# EAGLE board combined (EAGLE 6.5.0), part 1 of 2
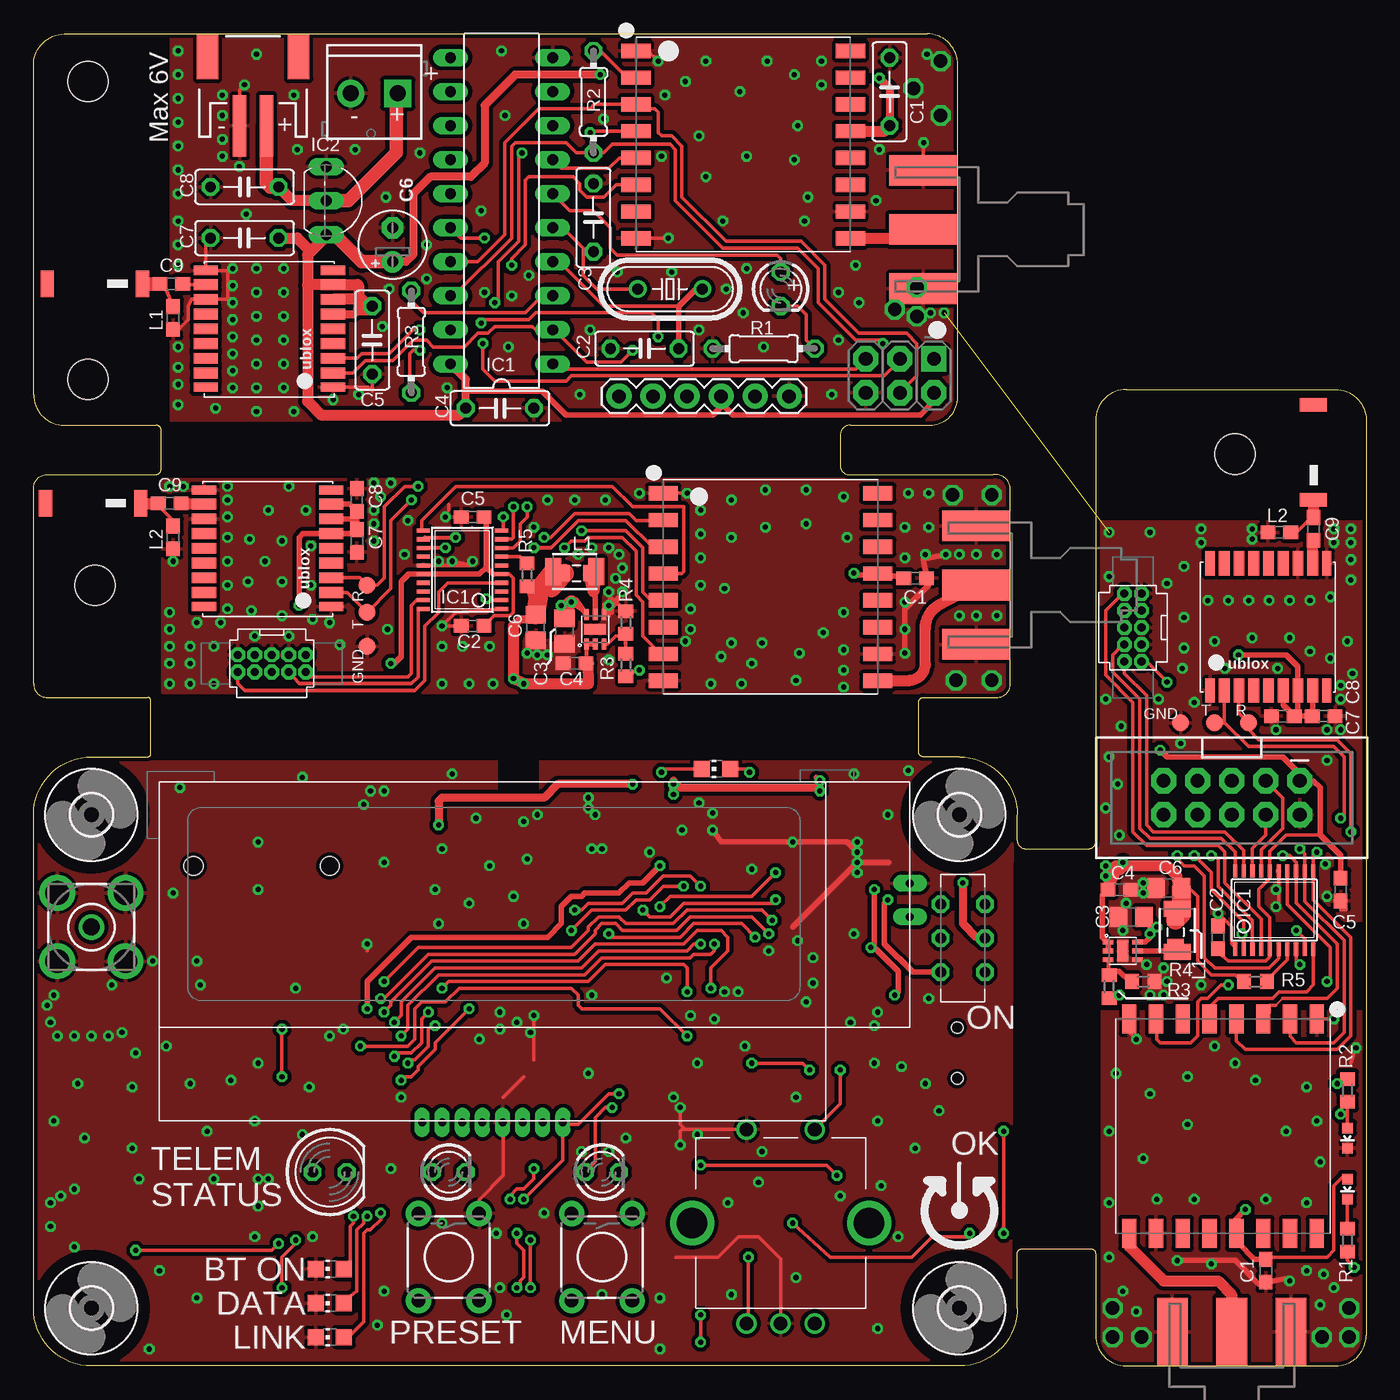
[diagram p0: board, top side]
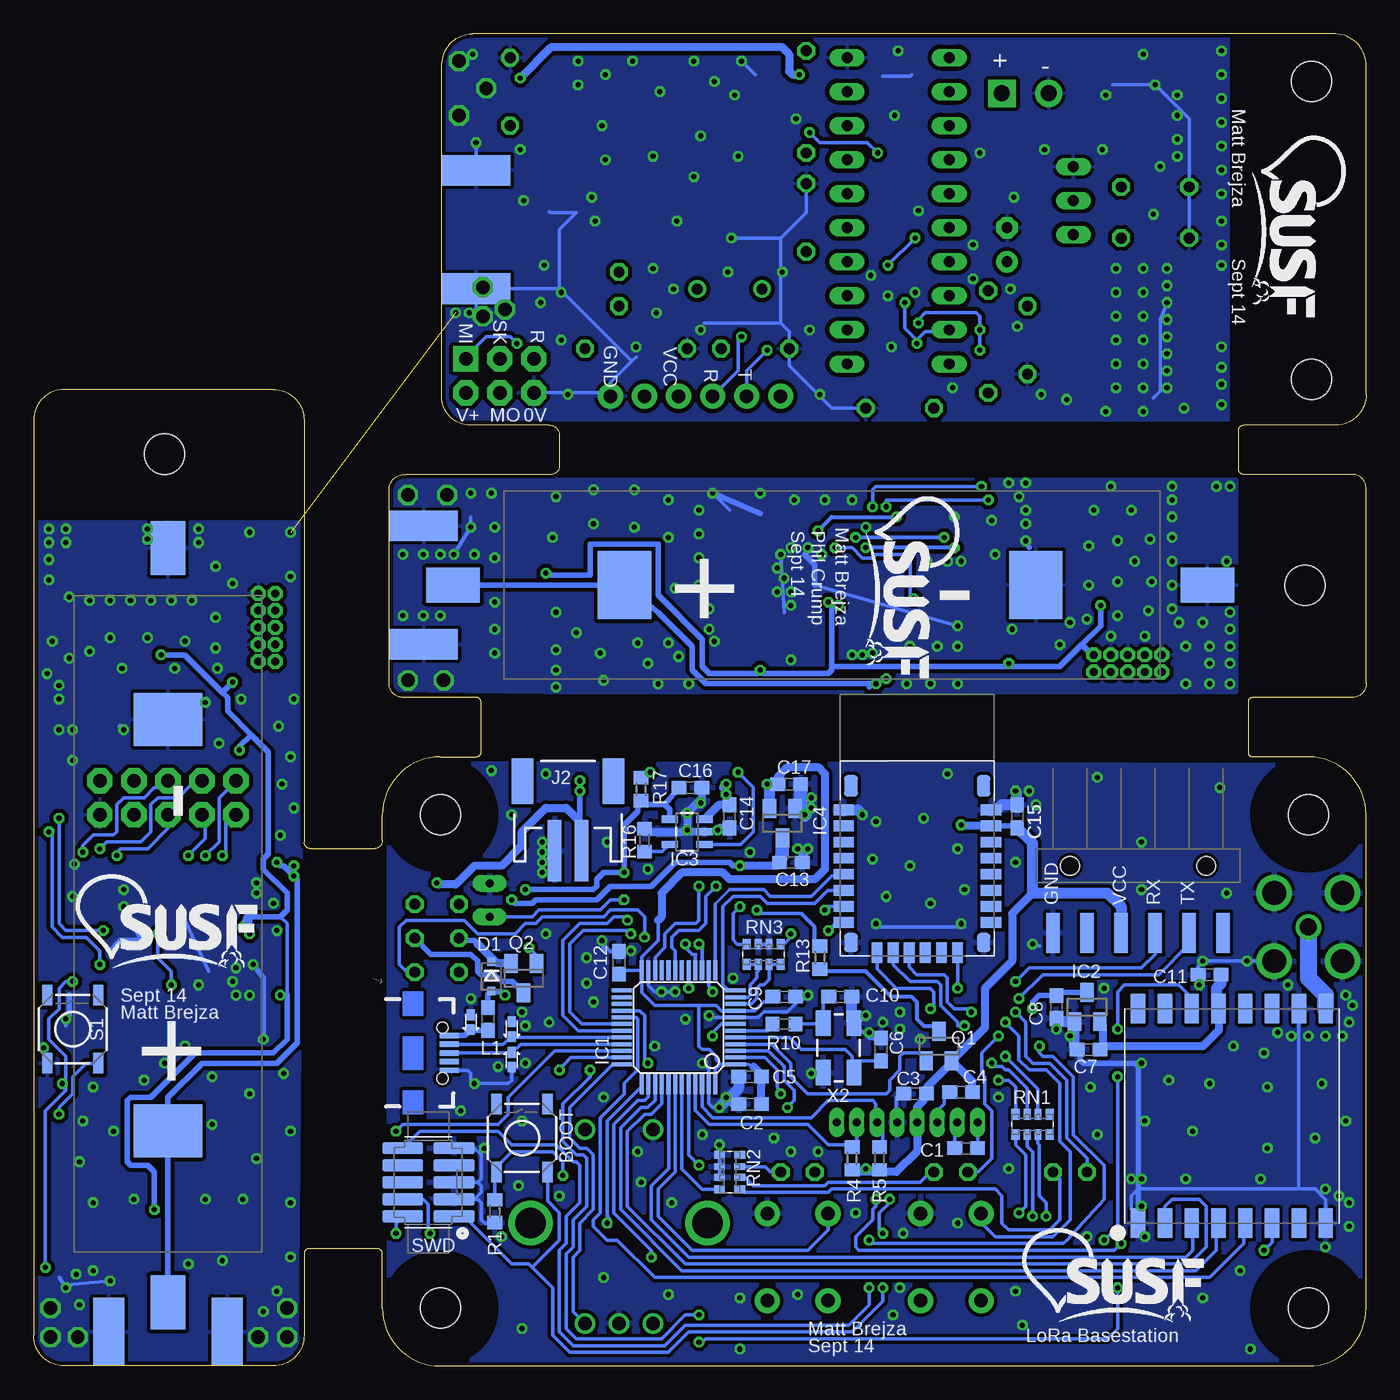
[diagram p1: board, bottom side, seen from below]

Size 99.44 x 99.44 mm. Coordinates in mm from the lower left corner, seen from the top.
Outline: 4.32,45.47 8.51,45.47 arc90 8.76,45.72 8.76,49.66 arc90 8.51,49.91 1.02,49.91 arc-90 0,50.93 0,65.53 arc-90 1.02,66.55 9.14,66.55 arc90 9.52,66.93 9.52,69.85 arc90 9.14,70.23 2.29,70.23 arc-90 0,72.52 0,97.03 arc-90 2.29,99.44 66.68,99.44 arc-90 68.96,97.16 68.96,72.14 arc-90 66.68,70.23 60.96,70.23 arc90 60.2,69.47 60.2,67.18 arc90 60.83,66.55 71.63,66.55 arc-90 72.9,65.53 72.9,50.93 arc-90 71.88,49.91 66.42,49.91 arc90 66.04,49.53 66.04,45.85 arc90 66.42,45.47 69.09,45.47 arc-90 73.41,41.15 73.41,39.24 arc90 74.04,38.61 78.74,38.61 arc90 79.25,39.12 79.25,70.61 arc-90 81.53,72.9 97.16,72.9 arc-90 99.44,70.61 99.44,2.29 arc-90 97.16,0 81.53,0 arc-90 79.25,2.29 79.25,8.38 arc90 78.87,8.76 73.79,8.76 arc90 73.41,8.38 73.41,4.32 arc-90 69.09,0 4.32,0 arc-90 0,4.32 0,41.15 arc-90 4.32,45.47
Copper layers (1*16): Top 0.035mm / dielectric 1.5mm / Bottom 0.035mm
Design rules "default *": minimum track width 7mil, minimum drill 15mil, track to track 7mil, track to pad 7mil, pad to pad 6mil, via to via 7mil, smd to smd 0mil, copper to edge 10mil, drill to drill 8mil, minimum pad ring 10mil, minimum via ring 8mil, stop-mask expansion 4mil, vias tented up to drill 16mil, thermal gap 10mil
Holes 3 mm at 89.66,68.07 4.57,58.29 4.06,95.89 4.06,73.66
tKeepout: area 35.1,43.2 to 37.3,45

## Footprints (pad centres in the part's own frame; a part is rotated, then mirrored left to right if it is on the bottom)
C0603 = smd 1.1 x 1: 1 -0.85,0; 2 0.85,0
C0805 = smd 1.3 x 1.5: 1 -0.95,0; 2 0.95,0
C050-025X075 = drill 0.813 octagon: 1 -2.54,0; 2 2.54,0
E2,5-5 = drill 0.813 pad 1.6: + -1.27,0 | drill 0.813 pad 1.6 octagon: - 1.27,0
SOD323-R = smd 0.6 x 0.6: A 1.1,0; C -1.1,0
SOD-523 = smd 0.8 x 0.6: A -0.55,0; C 0.55,0
3,0 = hole 3: 0,0
TQFP48 = smd 0.3 x 1.5: 1 -2.75,-4.25; 2 -2.25,-4.25; 3 -1.75,-4.25; 4 -1.25,-4.25; 5 -0.75,-4.25; 6 -0.25,-4.25; 7 0.25,-4.25; 8 0.75,-4.25; 9 1.25,-4.25; 10 1.75,-4.25; 11 2.25,-4.25; 12 2.75,-4.25; 25 2.75,4.25; 26 2.25,4.25; 27 1.75,4.25; 28 1.25,4.25; 29 0.75,4.25; 30 0.25,4.25; 31 -0.25,4.25; 32 -0.75,4.25; 33 -1.25,4.25; 34 -1.75,4.25; 35 -2.25,4.25; 36 -2.75,4.25 | smd 1.5 x 0.3: 13 4.25,-2.75; 14 4.25,-2.25; 15 4.25,-1.75; 16 4.25,-1.25; 17 4.25,-0.75; 18 4.25,-0.25; 19 4.25,0.25; 20 4.25,0.75; 21 4.25,1.25; 22 4.25,1.75; 23 4.25,2.25; 24 4.25,2.75; 37 -4.25,2.75; 38 -4.25,2.25; 39 -4.25,1.75; 40 -4.25,1.25; 41 -4.25,0.75; 42 -4.25,0.25; 43 -4.25,-0.25; 44 -4.25,-0.75; 45 -4.25,-1.25; 46 -4.25,-1.75; 47 -4.25,-2.25; 48 -4.25,-2.75
SOT23 = smd 1 x 1.4: 1 -0.95,-1.1; 2 0.95,-1.1; 3 0,1.1
SOT23-5 = smd 0.55 x 1.2: 1 -0.95,-1.3; 2 0,-1.3; 3 0.95,-1.3; 4 0.95,1.3; 5 -0.95,1.3
TSSOP20 = smd 0.305 x 0.991: 1 -2.925,-2.918; 2 -2.275,-2.918; 3 -1.625,-2.918; 4 -0.975,-2.918; 5 -0.325,-2.918; 6 0.325,-2.918; 7 0.975,-2.918; 8 1.625,-2.918; 9 2.275,-2.918; 10 2.925,-2.918; 11 2.925,2.918; 12 2.275,2.918; 13 1.625,2.918; 14 0.975,2.918; 15 0.325,2.918; 16 -0.325,2.918; 17 -0.975,2.918; 18 -1.625,2.918; 19 -2.275,2.918; 20 -2.925,2.918
LFCSP6 = smd 0.35 x 0.8: 1 -0.65,-1.1; 2 0,-1.1; 3 0.65,-1.1; 4 0.65,1.1; 5 0,1.1; 6 -0.65,1.1 | smd 1.6 x 0.8: EP 0,0
DIL20 = drill 0.813 long: 1 -11.43,-3.81; 2 -8.89,-3.81; 3 -6.35,-3.81; 4 -3.81,-3.81; 5 -1.27,-3.81; 6 1.27,-3.81; 7 3.81,-3.81; 8 6.35,-3.81; 9 8.89,-3.81; 10 11.43,-3.81; 11 11.43,3.81; 12 8.89,3.81; 13 6.35,3.81; 14 3.81,3.81; 15 1.27,3.81; 16 -1.27,3.81; 17 -3.81,3.81; 18 -6.35,3.81; 19 -8.89,3.81; 20 -11.43,3.81
TO92-INLINE = drill 0.813 long: GND -2.54,0; VIN 0,0; VOUT 2.54,0
SWD_SMD_SHROUD = smd 0.914 x 3.048: 1 -2.54,-1.905; 2 -2.54,1.905; 3 -1.27,-1.905; 4 -1.27,1.905; 5 0,-1.905; 6 0,1.905; 7 1.27,-1.905; 8 1.27,1.905; 9 2.54,-1.905; 10 2.54,1.905
JST-2-SMD = smd 1 x 4.6: 1 -1,-3.7; 2 1,-3.7 | smd 1.6 x 3.4: NC1 -3.4,1.5; NC2 3.4,1.5
SWD_PTH_SHROUD = drill 0.6 octagon: 1 -2.54,-0.635; 2 -2.54,0.635; 3 -1.27,-0.635; 4 -1.27,0.635; 5 0,-0.635; 6 0,0.635; 7 1.27,-0.635; 8 1.27,0.635; 9 2.54,-0.635; 10 2.54,0.635
2X3-NS = drill 1.016 pad 1.88 square: 1 -2.54,-1.27 | drill 1.016 pad 1.88 octagon: 2 -2.54,1.27; 3 0,-1.27; 4 0,1.27; 5 2.54,-1.27; 6 2.54,1.27
USB-B-MICRO-SMD_V03 = smd 1.4 x 0.4: D+1 2.7,0; D-1 2.7,0.65; GND1 2.7,-1.3; ID1 2.7,-0.65; VBUS1 2.7,1.3 | hole 0.85: 2.2,1.9; 2.2,-1.9
1X06-SMD = smd 1 x 3: 1 -6.35,5; 2 -3.81,5; 3 -1.27,5; 4 1.27,5; 5 3.81,5; 6 6.35,5 | hole 1.4: -5.08,0; 5.08,0
2X5-SHROUDED = drill 1.016 pad 1.88 octagon: 1 -1.27,5.08; 2 1.27,5.08; 3 -1.27,2.54; 4 1.27,2.54; 5 -1.27,0; 6 1.27,0; 7 -1.27,-2.54; 8 1.27,-2.54; 9 -1.27,-5.08; 10 1.27,-5.08
SCREWTERMINAL-3.5MM-2 = drill 1.2 pad 2.032 square: 1 0,0 | drill 1.2 pad 2.032: 2 3.5,0
FTDI_BASIC = drill 1.016 pad 1.88: CTS 10.16,0; DTR 0,0; GND 12.7,0; RXI 2.54,0; TXO 5.08,0; VCC 7.62,0
0603 = smd 1.1 x 1: 1 -0.85,0; 2 0.85,0
0805 = smd 0.8 x 1.2: 1 -0.9,0; 2 0.9,0
1210 = smd 1.2 x 2: 1 -1.6,0; 2 1.6,0
CHIP-LED0805 = smd 1.2 x 1.2: A 0,-1.05; C 0,1.05
LED5MM = drill 0.813 octagon: A -1.27,0; K 1.27,0
LED3MM = drill 0.813 octagon: A -1.27,0; K 1.27,0
LED-0603 = smd 0.8 x 0.8: A 0,-0.75; C 0,0.75
HC49/S = drill 0.813: 1 -2.413,0; 2 2.413,0
R0603 = smd 1 x 1.1: 1 -0.85,0; 2 0.85,0
0204/7 = drill 0.813 octagon: 1 -3.81,0; 2 3.81,0
EXB38V = smd 0.6 x 0.8: 1 -1.275,-0.75; 4 1.275,-0.75; 5 1.275,0.75; 8 -1.275,0.75 | smd 0.5 x 0.8: 2 -0.4,-0.75; 3 0.4,-0.75; 6 0.4,0.75; 7 -0.4,0.75
TACTILE-PTH = drill 1.016 pad 1.88: 1 -3.251,2.261; 2 3.251,2.261; 3 -3.251,-2.261; 4 3.251,-2.261
TACTILE_SWITCH_SMD = smd 1.524 x 0.762: 1 -2.54,1.905; 2 2.54,1.905; 3 -2.54,-1.905; 4 2.54,-1.905
ROTARY_ENC_PLAIN = drill 1.016: A 7.493,-2.54; B 7.493,2.54; C 7.493,0; SW+ -6.985,2.54; SW- -6.985,-2.54 | drill 2.286: P$3 0,6.604; P$4 0,-6.604
B1,27 = smd 1.27 x 1.27: TP 0,0
NHD-C0216CIZ-FSW = drill 0.6 long: 1 30.1,-0.1; 2 28.6,-0.1; 3 27.1,-0.1; 4 25.6,-0.1; 5 24.1,-0.1; 6 22.6,-0.1; 7 21.1,-0.1; 8 19.6,-0.1 | drill 0.6 pad 1.27 long: A 56,15.24; K 56,17.74
RFM97 = smd 2.184 x 1.067: 1 0,0; 2 0,-2; 3 0,-4; 4 0,-6; 5 0,-8; 6 0,-10; 7 0,-12; 8 0,-14; 9 16,-14; 10 16,-12; 11 16,-10; 12 16,-8; 13 16,-6; 14 16,-4; 15 16,-2; 16 16,0
RN4020 = smd 1.5 x 0.8: 1 0.25,10.9; 2 0.25,9.7; 3 0.25,8.5; 4 0.25,7.3; 5 0.25,6.1; 6 0.25,4.9; 7 0.25,3.7; 8 0.25,2.5; 17 11.25,2.5; 18 11.25,3.7; 19 11.25,4.9; 20 11.25,6.1; 21 11.25,7.3; 22 11.25,8.5; 23 11.25,9.7; 24 11.25,10.9 | smd 1 x 1.4: 9 0.8,1; 16 10.7,1 | smd 0.8 x 1.5: 10 2.75,0.25; 11 3.95,0.25; 12 5.15,0.25; 13 6.35,0.25; 14 7.55,0.25; 15 8.75,0.25 | smd 1 x 1.6: S1 0.8,12.7; S2 10.7,12.7
DPDTSLIDE = drill 0.8 octagon: 1A -2.54,0; 1B 2.54,0; 1X 0,0; 2A -2.54,3.3; 2B 2.54,3.3; 2X 0,3.3
JTI_ANTENNA-1575AT43A40 = smd 1 x 2: FEED -3.175,0; NC 3.925,0
KEYSTONE53 = smd 3.96 x 5.08: N1 14.73,0; P2 -15.97,0 | smd 4 x 2.6: N2 27.53,0; P1 -28.77,0
BU-SMA-V = drill 1.27: 1 0,0 | drill 1.778: 2 -2.55,2.55; 3 2.55,2.55; 4 2.55,-2.55; 5 -2.55,-2.55
CRYSTAL-SMD-5X3 = smd 1.9 x 1.1: 1 -1.85,-1.15; 2 1.85,-1.15; 3 1.85,1.15; 4 -1.85,1.15
UBLOX_MAX = smd 1.8 x 0.7: 1_GND 4.95,-4.4; 9_V_RESET 4.95,4.3; 10_GND -4.55,4.3; 18_RESERVED -4.55,-4.4 | smd 1.8 x 0.8: 2_TXD1 4.95,-3.35; 3_RXD1 4.95,-2.25; 4_TIMEPULSE 4.95,-1.15; 5_EXTINT0 4.95,-0.05; 6_V_BCKP 4.95,1.05; 7_VCC_IO 4.95,2.15; 8_VCC 4.95,3.25; 11_RF_IN -4.55,3.25; 12_GND -4.55,2.15; 13_ANTON -4.55,1.05; 14_VCC_RF -4.55,-0.05; 15_RESERVED -4.55,-1.15; 16_SDA2 -4.55,-2.25; 17_SCL2 -4.55,-3.35
J502-ND-142-0701-801/806 = smd 5.08 x 2.286: 1 2.565,0; G@1 2.565,4.42; G@2 2.565,-4.42 | smd 5.08 x 2.286 bottom: G@3 2.565,4.42; G@4 2.565,-4.42

## Placement (x,y rotation side)
C1  [C0603]  29.85,16.26 180 bottom
C2  [C0603]  45.97,19.56 0 bottom
C3  [C0603]  33.65,20.32 0 bottom
C4  [C0603]  30.23,20.45 0 bottom
C5  [C0603]  45.97,21.59 0 bottom
C6  [C0603]  36.2,23.62 270 bottom
C7  4u7  [C0603]  20.7,23.62 0 bottom
C8  4u7  [C0603]  23.11,26.8 90 bottom
C9  [C0603]  43.43,27.56 180 bottom
C10  [C0603]  39.24,27.56 180 bottom
C11  100n  [C0603]  11.68,29.21 0 bottom
C12  [C0603]  55.75,30.1 270 bottom
C13  [C0603]  42.93,37.59 180 bottom
C14  4u7  [C0603]  47.5,41.02 90 bottom
C15  [C0603]  26.04,41.02 270 bottom
C16  4u7  [C0603]  50.42,43.18 180 bottom
C17  4u7  [C0603]  43.05,43.43 180 bottom
C18  10u  [C0805]  81.92,33.53 180 top
C19  10u  [C0805]  84.71,35.69 180 top
C20  100n  [C0603]  88.39,32 90 top
C21  1u  [C0603]  97.54,35.56 270 top
C22  4u7  [C0603]  91.95,7.11 270 top
C23  1u  [C0603]  93.22,48.51 180 top
C24  100n  [C0603]  96.27,48.51 0 top
C25  [C0603]  95.5,62.48 270 top
C26  1u  [C0603]  81.03,35.56 0 top
C27  10u  [C0805]  39.62,54.86 270 top
C28  10u  [C0805]  37.46,55.12 270 top
C29  100n  [C0603]  32.77,55.24 180 top
C30  1u  [C0603]  32.77,63.37 180 top
C31  4u7  [C0603]  65.79,58.8 0 top
C32  1u  [C0603]  24.13,61.59 270 top
C33  100n  [C0603]  24.13,64.64 90 top
C34  [C0603]  10.16,64.39 0 top
C35  1u  [C0603]  40.39,52.45 180 top
C36  [C0603]  10.29,80.77 0 top
C37  100n  [C050-025X075]  15.75,84.2 180 top
C38  1u  [C050-025X075]  25.27,76.58 270 top
C39  1u  [C050-025X075]  15.75,88.01 180 top
C40  27p  [C050-025X075]  45.59,75.95 0 top
C41  27p  [C050-025X075]  41.78,85.73 270 top
C42  100n  [C050-025X075]  34.8,71.5 0 top
C43  1u  [C050-025X075]  63.88,95.12 90 top
C44  10u  [E2,5-5]  26.8,83.69 90 top
D1  BAT760  [SOD323-R]  65.28,29.08 270 bottom
D2  RB751  [SOD-523]  63.75,25.15 270 bottom
D3  RB751  [SOD-523]  63.75,22.86 90 bottom
D4  RB751  [SOD-523]  66.8,25.65 270 bottom
H1  MOUNT-HOLE3.0  [3,0]  4.32,41.15 0 top
H2  MOUNT-HOLE3.0  [3,0]  69.09,41.15 0 top
H3  MOUNT-HOLE3.0  [3,0]  4.32,4.32 0 top
H4  MOUNT-HOLE3.0  [3,0]  69.09,4.32 0 top
IC1  STM32F0  [TQFP48]  51.31,25.27 90 bottom
IC2  MCP1700TT  [SOT23]  20.83,26.8 0 bottom
IC3  MCP73831  [SOT23-5]  50.67,39.88 90 bottom
IC4  MCP1700TT  [SOT23]  43.56,40.51 180 bottom
IC5  STM32F030F4  [TSSOP20]  92.58,34.04 0 top
IC6  ADP1607  [LFCSP6]  81.28,30.99 270 top
IC7  STM32F030F4  [TSSOP20]  32,59.44 90 top
IC8  ADP1607  [LFCSP6]  41.91,54.99 0 top
IC9  TINY2313-*P*  [DIL20]  34.92,86.23 90 top
IC10  MCP1700  [TO92-INLINE]  21.84,87 270 top
J1  SWD_SHROUD_SMD  [SWD_SMD_SHROUD]  69.98,13.72 90 bottom
J2  [JST-2-SMD]  59.56,42.16 0 bottom
J3  SWD_PTH_SHROUD  [SWD_PTH_SHROUD]  82.04,55.12 90 top
J4  SWD_PTH_SHROUD  [SWD_PTH_SHROUD]  17.78,52.45 180 top
J5  AVR_SPI_PRG_6NS  [2X3-NS]  64.64,73.91 180 top
J6  [JST-2-SMD]  16.38,96.27 0 top
JP1  USB_MICROB_PLUGCONN-11752  [USB-B-MICRO-SMD_V03]  71.12,23.37 0 bottom
JP2  [1X06-SMD]  17.02,37.34 180 bottom
JP3  M05X2SHD  [2X5-SHROUDED]  89.41,42.42 270 top
JP4  M023.5MM  [SCREWTERMINAL-3.5MM-2]  27.18,95 180 top
JP5  FTDI_BASICPTH  [FTDI_BASIC]  43.69,72.39 0 top
L1  [0603]  65.53,25.91 270 bottom
L2  2u2  [0805]  85.22,32.38 270 top
L3  [0603]  92.96,62.23 180 top
L4  [1210]  85.34,32.51 270 top
L5  2u2  [0805]  40.51,59.18 0 top
L6  [0603]  10.41,61.85 270 top
L7  [1210]  40.39,59.31 0 top
L8  [0603]  10.41,78.23 270 top
LED1  [CHIP-LED0805]  50.93,44.58 90 top
LED2  [LED5MM]  22.1,14.48 0 top
LED3  [LED3MM]  30.99,14.48 0 top
LED4  [LED3MM]  42.42,14.48 0 top
LED5  [CHIP-LED0805]  22.1,7.24 90 top
LED6  [CHIP-LED0805]  22.1,4.7 90 top
LED7  [CHIP-LED0805]  22.1,2.16 90 top
LED8  [LED-0603]  98.04,17.02 180 top
LED9  [LED-0603]  98.04,13.21 180 top
LED10  [LED3MM]  55.75,80.39 270 top
Q1  BSS84  [SOT23]  31.88,23.88 0 bottom
Q2  BSS84  [SOT23]  62.86,28.96 180 bottom
Q3  [HC49/S]  47.5,80.39 0 top
R1  [R0603]  65.02,11.56 90 bottom
R2  220k  [R0603]  82.8,28.7 180 top
R3  360k  [R0603]  80.26,28.32 270 top
R4  4k7  [R0603]  38.35,15.49 90 bottom
R5  4k7  [R0603]  36.32,15.49 90 bottom
R6  330  [R0603]  98.04,20.57 90 top
R7  330  [R0603]  98.04,9.4 90 top
R8  10k  [R0603]  91.19,28.7 0 top
R9  360k  [R0603]  44.2,52.32 270 top
R10  [R0603]  43.43,25.53 180 bottom
R11  220k  [R0603]  44.2,55.5 270 top
R12  10k  [R0603]  36.83,59.05 90 top
R13  22  [R0603]  40.77,30.48 270 bottom
R14  330  [0204/7]  54.48,75.95 0 top
R15  10k  [0204/7]  28.19,76.45 270 top
R16  [R0603]  53.85,39.24 90 bottom
R17  [R0603]  54.1,43.05 90 bottom
R18  10k  [0204/7]  41.78,94.36 270 top
RN1  330  [EXB38V]  24.89,18.03 0 bottom
RN2  330  [EXB38V]  47.5,14.48 270 bottom
RN3  10k  [EXB38V]  44.96,30.73 180 bottom
S1  SWITCH-MOMENTARY-2PTH  [TACTILE-PTH]  30.99,8.13 270 top
S2  SWITCH-MOMENTARY-2PTH  [TACTILE-PTH]  42.42,8.13 270 top
S3  SWITCH-MOMENTARY-2SMD  [TACTILE_SWITCH_SMD]  62.99,17.02 90 bottom
S4  SWITCH-MOMENTARY-2SMD  [TACTILE_SWITCH_SMD]  96.52,25.15 90 bottom
SW1  ROTARTY_ENCODER  [ROTARY_ENC_PLAIN]  55.75,10.67 270 top
TP1  PTR1B1,27  [B1,27]  85.6,48.01 0 top
TP2  PTR1B1,27  [B1,27]  88.14,48.01 0 top
TP3  PTR1B1,27  [B1,27]  90.68,48.01 0 top
TP4  PTR1B1,27  [B1,27]  24.89,56.26 90 top
TP5  PTR1B1,27  [B1,27]  24.89,58.29 90 top
TP6  PTR1B1,27  [B1,27]  24.89,53.72 90 top
U1  NHD-C0216CIZ-FSW  [NHD-C0216CIZ-FSW]  9.4,18.29 0 top
U2  RFM98  [RFM97]  17.02,10.67 90 bottom
U3  RN4020  [RN4020]  39.24,30.61 0 bottom
U$1  DPDTSLIDE  [DPDTSLIDE]  70.99,31.94 90 top
U$2  [SUSF-XSM]  25.65,3.3 0 bottom
U$3  [SUSF-XSM]  96.27,29.72 0 bottom
U$4  JTI_ANTENNA-1575AT43A40  [JTI_ANTENNA-1575AT43A40]  4.83,64.39 180 top
U$5  JTI_ANTENNA-1575AT43A40  [JTI_ANTENNA-1575AT43A40]  95.5,67.82 90 top
U$6  KEYSTONE-53  [KEYSTONE53]  89.41,33.53 90 bottom
U$7  KEYSTONE-53  [KEYSTONE53]  39.37,58.29 0 bottom
U$8  [SUSF-XSM]  37.34,64.9 270 bottom
U$9  JTI_ANTENNA-1575AT43A40  [JTI_ANTENNA-1575AT43A40]  4.95,80.77 180 top
U$10  [SUSF-XSM]  8.51,91.82 270 bottom
X1  BU-SMA-V  [BU-SMA-V]  4.32,32.77 0 top
X2  CRYSTAL-GROUNDED  [CRYSTAL-SMD-5X3]  39.37,23.75 90 bottom
X3  UBLOX_MAX  [UBLOX_MAX]  92.2,55.37 270 top
X4  SMA-142-0701-801/806  [J502-ND-142-0701-801/806]  89.41,0 90 top
X5  RFM98  [RFM97]  95.76,25.91 270 top
X6  UBLOX_MAX  [UBLOX_MAX]  17.27,61.09 0 top
X7  SMA-142-0701-801/806  [J502-ND-142-0701-801/806]  72.9,58.29 180 top
X8  RFM98  [RFM97]  46.99,65.15 0 top
X9  UBLOX_MAX  [UBLOX_MAX]  17.4,77.47 0 top
X10  SMA-142-0701-801/806  [J502-ND-142-0701-801/806]  68.96,84.84 180 top
X11  RFM98  [RFM97]  44.96,98.17 0 top

## Library data of the parts
C1-C17 R1 R4 R5 R10 R13 R16 R17 = resistor
C18-C44 R2 R3 R6-R9 R11 R12 R14 R15 R18 = rcl
D1 IC1 IC2 IC4 IC5 IC7 IC10 J1 J3 J4 LED10 U1 = dtb
D2-D4 = SparkFun-DiscreteSemi; PROD_ID: DIO-11018
H1-H4 = Mounting
IC3 = SparkFun-PowerIC; PROD_ID: IC-09995
IC6 IC8 S1-S4 U2 U3 U$1-U$3 U$6-U$8 U$10 X5 X8 X11 = Mine
IC9 = avr-7
J2 J6 = dtb; PROD_ID: CONN-08352
J5 JP2-JP5 = SparkFun-Connectors
JP1 = SparkFun-Connectors; PROD_ID: CONN-11752
L1-L8 = SparkFun-Passives
LED1-LED7 = led
LED8 LED9 = SparkFun-LED
Q1 Q2 = transistor-small-signal
Q3 = crystal; OC_FARNELL: 1667008; OC_NEWARK: unknown
RN1-RN3 = resistor-dil; OC_FARNELL: unknown; OC_NEWARK: unknown
SW1 = SparkFun-Electromechanical
TP1-TP6 = testpad
U$4 U$5 U$9 X3 X6 X9 = Ava
X1 = con-coax; OC_FARNELL: unknown; OC_NEWARK: unknown
X2 = SparkFun-FreqCtrl
X4 X7 X10 = con-coax1; MF: JOHNSON COMPONENTS; MPN: 142-0701-801; OC_FARNELL: 1608592; OC_NEWARK: 90F2624

## Nets
3.3V: C7.2 C11.2 IC2.2 U2.13
9_V_RESET: X3.9_V_RESET
9_V_RESET1: X6.9_V_RESET
9_V_RESET2: X9.9_V_RESET
+3V1: C18.1 C20.1 C21.1 C22.1 C23.1 C24.1 IC5.5 IC5.16 IC6.6 J3.1 JP3.1 LED9.A R3.2 X3.6_V_BCKP X3.7_VCC_IO X3.8_VCC X5.13
+3V2: C27.1 C29.1 C30.1 C31.1 C32.1 C33.1 IC7.5 IC7.16 IC8.6 J4.1 R9.2 X6.6_V_BCKP X6.7_VCC_IO X6.8_VCC X8.13
+3V3: C2.2 C3.2 C4.2 C5.2 C9.2 C12.2 C15.2 C17.2 IC1.1 IC1.9 IC1.24 IC1.48 IC4.2 J1.1 JP2.4 Q1.2 R4.1 R5.1 S3.3 U1.5 U3.23
+3V4: C37.1 C38.1 C42.1 C43.1 C44.+ IC9.20 IC10.VOUT J5.2 JP5.VCC X9.6_V_BCKP X9.7_VCC_IO X9.8_VCC X11.13
AIN1: IC1.11 RN3.5 RN3.6
BACK_EN: IC1.4 Q1.1
CLK: IC7.2 X8.7
CMD: IC1.19 U3.8
DM: D2.C IC1.32 JP1.D-1
DP: D3.C IC1.33 JP1.D+1
GND: C2.1 C3.1 C5.1 C6.1 C7.1 C8.1 C9.1 C10.1 C11.1 C12.1 C13.1 C14.1 C15.1 C16.1 C17.1 D2.A D3.A D4.A IC1.8 IC1.23 IC1.47 IC2.1 IC3.2 IC4.1 J1.3 J1.5 J1.9 J2.1 JP1.GND1 JP2.6 LED5.C LED6.C LED7.C R1.1 R16.2 RN2.1 RN2.2 RN2.3 RN3.2 RN3.3 S1.1 S2.1 SW1.C SW1.SW- U1.4 U1.K U2.1 U2.8 U2.10 U3.1 U3.9 U3.16 U3.24 X1.2 X1.3 X1.4 X1.5 X2.2 X2.4
GND2: C27.2 C28.2 C29.2 C30.2 C31.2 C32.2 C33.2 C35.2 IC7.1 IC7.15 IC8.4 IC8.EP J4.3 J4.5 J4.9 L6.2 R11.1 TP6.TP U$7.N1 U$7.N2 X6.1_GND X6.10_GND X6.12_GND X7.G@1 X7.G@2 X7.G@3 X7.G@4 X8.1 X8.8 X8.10
GND3: C18.2 C19.2 C20.2 C21.2 C22.2 C23.2 C24.2 C26.2 C37.2 C38.2 C39.2 C40.1 C41.1 C42.2 C43.2 C44.- IC5.1 IC5.15 IC6.4 IC6.EP IC9.10 IC10.GND J3.3 J3.5 J3.9 J5.6 J6.1 JP3.2 JP4.2 JP5.GND L3.2 L8.2 LED8.C R2.1 R14.1 S4.1 TP1.TP U$6.N1 U$6.N2 X3.1_GND X3.10_GND X3.12_GND X4.G@1 X4.G@2 X4.G@3 X4.G@4 X5.1 X5.8 X5.10 X9.1_GND X9.10_GND X9.12_GND X10.G@1 X10.G@2 X10.G@3 X10.G@4 X11.1 X11.8 X11.10
GPIO1: IC5.3 JP3.8
GPIO2: IC5.2 JP3.9 X5.7
GPIO3: IC5.6 JP3.10
GPIO4: IC7.3
GPIO5: IC7.6
LED1: IC1.16 LED3.A
LED2: IC1.3 LED4.A
LED3: IC1.17 LED2.A
LED4: IC1.43 RN2.4
MISO: IC1.40 U2.2
MISO1: IC5.12 JP3.7 X5.2
MISO2: IC7.12 X8.2
MISO3: IC9.18 J5.1 R18.2
MOSI: IC1.41 U2.3
MOSI1: IC5.13 JP3.6 X5.3
MOSI2: IC7.13 X8.3
MOSI3: IC9.17 J5.4 X11.3
N$1: U2.9 X1.1
N$2: D1.C Q2.2 U$1.2X
N$3: Q1.3 R13.2
N$4: IC1.44 R1.2 S3.1
N$5: RN1.8 U3.10
N$6: LED3.K RN2.6
N$7: IC3.5 R16.1
N$8: C1.1 U1.8
N$9: C1.2 U1.7
N$10: LED4.K RN2.7
N$11: LED2.K RN2.5
N$12: C4.1 U1.6
N$13: RN1.7 U3.11
N$14: RN1.6 U3.12
N$15: LED7.A RN1.1
N$16: LED6.A RN1.2
N$17: LED5.A RN1.3
N$19: X4.1 X5.9
N$20: IC6.5 L2.2 L4.2
N$21: IC6.3 R2.2 R3.1
N$22: LED9.C R7.2
N$23: R13.1 U1.A
N$24: IC5.7 R8.2
N$25: C25.2 X3.11_RF_IN
N$26: C25.1 L3.1 U$5.FEED
N$27: IC1.10 RN3.7 RN3.8
N$28: JP1.ID1
N$29: IC3.1 LED1.C
N$30: IC1.6 R10.2
N$31: C6.2 IC1.5 X2.1
N$32: C10.2 R10.1 X2.3
N$33: C14.2 IC3.3 J2.2 Q2.3 U$1.1X
N$34: LED1.A R17.2
N$35: D4.C JP1.VBUS1 L1.2
N$36: IC5.14 R6.2 R7.1
N$37: LED8.A R6.1 S4.3
N$38: X5.6
N$39: X7.1 X8.9
N$40: IC8.5 L5.2 L7.2
N$41: IC8.3 R9.1 R11.2
N$42: IC7.7 R12.2
N$43: C34.2 X6.11_RF_IN
N$44: C34.1 L6.1 U$4.FEED
N$45: X10.1 X11.9
N$46: C36.2 X9.11_RF_IN
N$47: C36.1 L8.1 U$9.FEED
N$48: C39.1 IC10.VIN J6.2 JP4.1
N$49: C40.2 IC9.4 Q3.2
N$50: C41.2 IC9.5 Q3.1
N$51: LED10.K R14.2
N$52: IC9.6 LED10.A
N$53: JP5.TXO R15.2 X9.3_RXD1
N$54: R18.1 X11.2
NSS: IC1.29 U2.5
NSS1: IC5.10 X5.5
NSS2: IC7.10 X8.5
NSS3: IC9.7 X11.5
P_RST: IC1.2 U1.1 U2.6
R_INT: IC1.28 U2.14
R_RST: IC9.16 X11.6
ROT_A: IC1.36 SW1.B
ROT_B: IC1.38 SW1.A
ROT_M: IC1.35 SW1.SW+
RST: IC1.7 J1.10
RST1: IC5.4 J3.10
RST2: IC7.4 J4.10
RST3: IC9.1 J5.5
SCK: IC9.19 J5.3 X11.4
SCL: IC1.45 R4.2 U1.2
SCL1: IC5.17 JP3.3
SCL2: IC7.17
SCLK: IC1.39 U2.4
SCLK1: IC5.11 JP3.5 X5.4
SCLK2: IC7.11 X8.4
SDA: IC1.46 R5.2 U1.3
SDA1: IC5.18 JP3.4
SDA2: IC7.18
SW1: IC1.42 S2.3
SW2: IC1.15 S1.3
SWCLK: IC1.37 J1.4
SWCLK1: IC5.20 J3.4
SWCLK2: IC7.20 J4.4
SWDAT: IC1.34 J1.2
SWDAT1: IC5.19 J3.2
SWDAT2: IC7.19 J4.2
UART_RX: IC5.9 TP2.TP X3.2_TXD1
UART_RX1: IC7.9 TP4.TP X6.2_TXD1
UART_RX2: IC9.2 JP5.RXI X9.2_TXD1
UART_TX: IC5.8 TP3.TP X3.3_RXD1
UART_TX1: IC7.8 TP5.TP X6.3_RXD1
UART_TX2: IC9.3 R15.1
USART1_RX: IC1.31 JP2.3
USART1_TX: IC1.30 JP2.2
USART2_RX: IC1.13 U3.5
USART2_TX: IC1.12 U3.6
VBAT: C19.1 C26.1 IC6.1 IC6.2 L2.1 L4.1 R8.1 U$6.P1 U$6.P2
VBAT1: C28.1 C35.1 IC8.1 IC8.2 L5.1 L7.1 R12.1 U$7.P1 U$7.P2
VBAT_S: RN3.1 U$1.1A
VBUS: C16.2 D1.A IC3.4 L1.1 Q2.1 R17.1 RN3.4
VIN_S: C8.2 C13.2 IC2.3 IC4.3 U$1.2A
WAKE: IC1.14 U3.15
WAKE_SW: IC1.22 U3.7